# Altium PCB Transmitter.PcbDoc (part 2 of 2)
Units mm, origin at the board's own origin, x right, y up, seen from the top; angles counter-clockwise.
Board outline 55 x 40.38 mm, 4 copper layers (Top Layer, GND, Power, Bottom Layer), stack 1.56 mm thick; 129 components, 71 nets, 438 pads, 189 vias.
Unrouted connection lines stored in the file: 5.
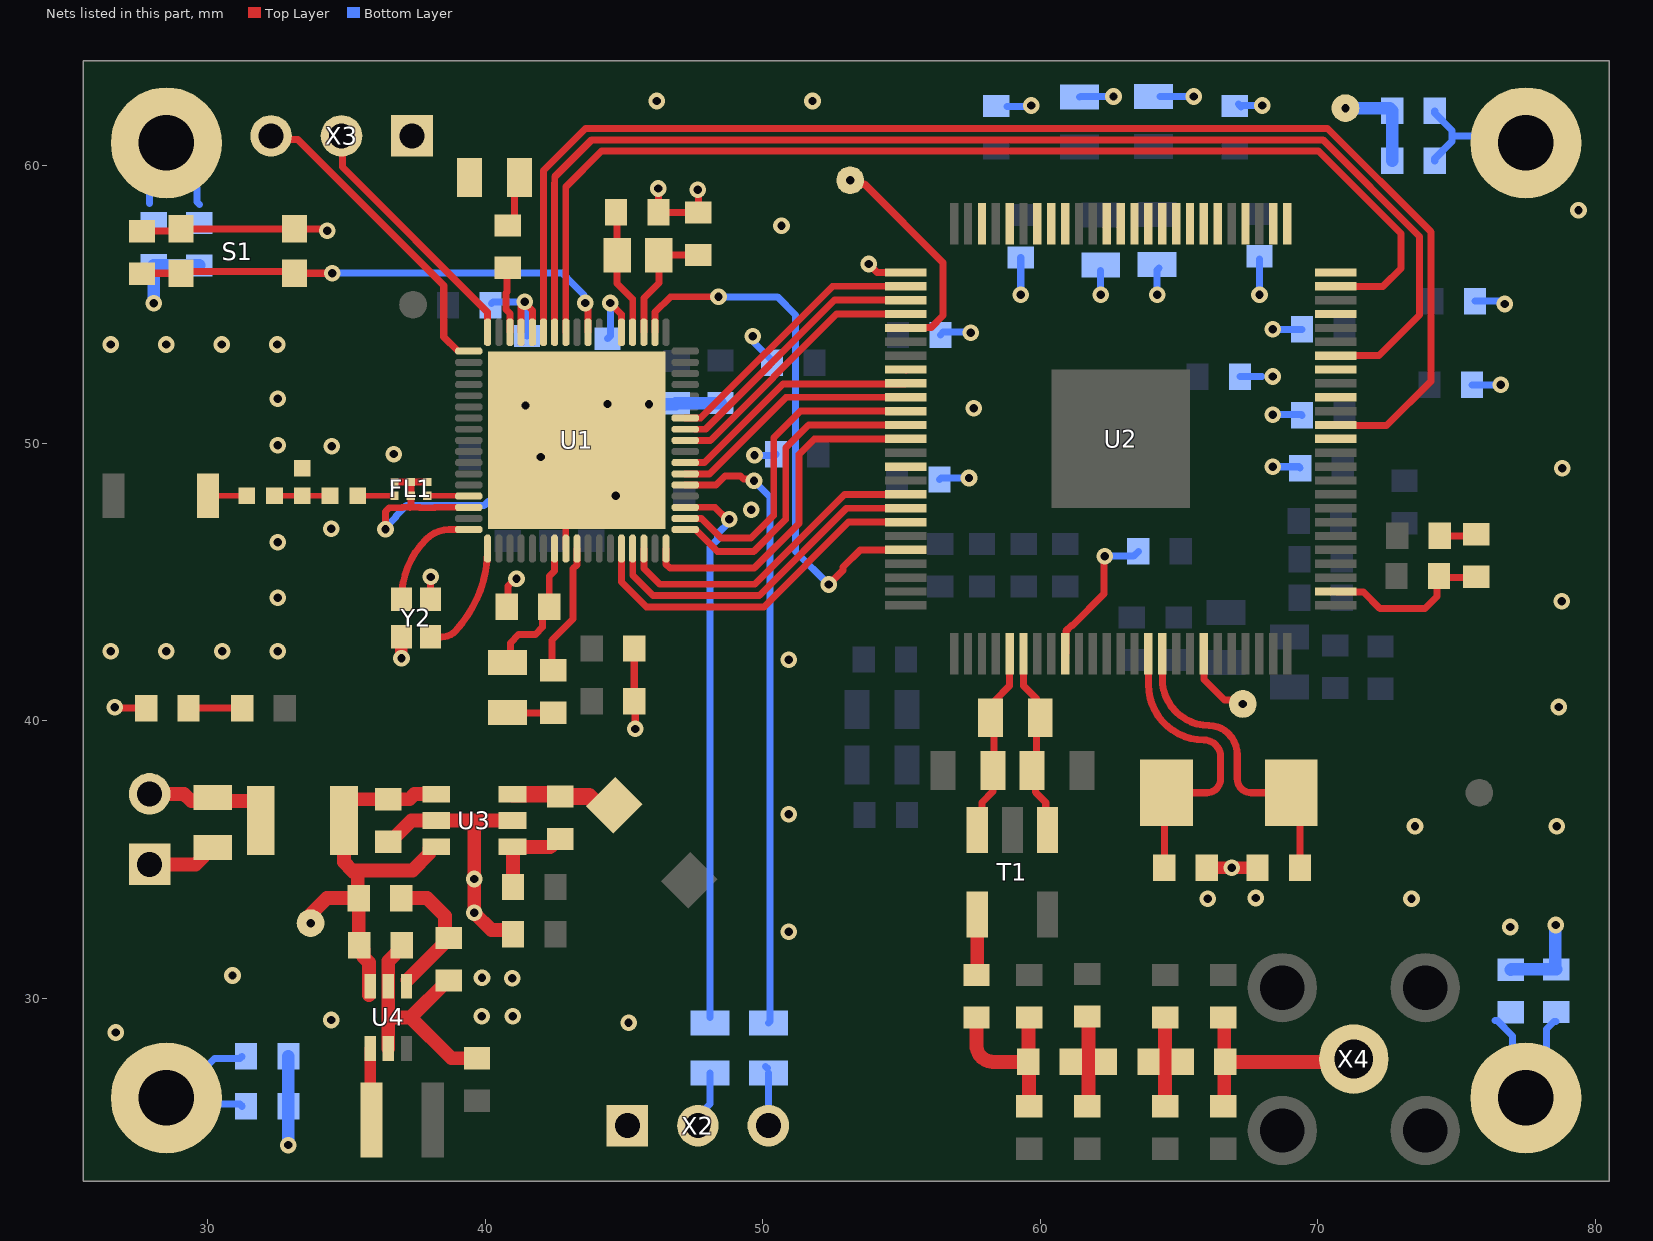
[diagram p4: the nets of this part, all layers, seen from the top]

## Via types
v1: diameter 0.6, hole 0.3, Top Layer to Bottom Layer, tented both sides, 175 vias
v2: diameter 0.6, hole 0.3, Top Layer to Bottom Layer, tented bottom, 6 vias
v3: diameter 0.6, hole 0.5, Top Layer to Bottom Layer, tented both sides, 4 vias
v4: diameter 0.6, hole 0.3, Top Layer to Bottom Layer, 3 vias
v5: diameter 0.6, hole 0.5, Top Layer to Bottom Layer, 1 vias

## Nets (pads, with @x,y where several pads share a name; then routed paths per layer and width w, separated by ;. In a path a pad name is that pad's centre, name@x,y a point inside that pad or via, vN(x,y) a via of type N, cw(c..) or ccw(c..) an arc to the next point about the centre after c; other vN are vias at no path point) (continued)
DGND: C1.1 C2.1 C4.1 C5.1 C6.1 C7.1 C8.1 C9.1 C10.1 C11.1 C12.1 C13.2 C14.1 C15.1 C17.1 C18.1 C19.1 C20.2 C21.2 C22.1 C23.2 C24.1 C25.1 C26.1 C27.1 C28.1 C29.1 C30.1 C31.1 C39.2 C40.1 C41.1 C42.1 C43.1 C44.1 C45.1 C46.1 C53.1 C54.1 C63.1 C64.1 C65.1 C66.1 D1.1 FB5.2 FL1.1 FL1.2 FL1.3 FL1.4 GND.1 L6.2 R4.1 R12.1 R13.1 R14.1 R15.1 R16.2 S1.2 U1.32 U1.42 U1.69 U2.13 U2.16 U2.18 U2.22 U2.25 U2.26 U2.27 U2.29 U2.31 U2.32 U2.33 U2.34 U2.35 U2.36 U2.37 U2.38 U2.39 U2.42 U2.43 U2.44 U2.46 U2.48 U2.51 U2.58 U2.65 U3.2 U3.5 U4.2 U4.5 X1.1 X2.1 X3.1 Y2.2 Y2.4 | length 96.9
  Top Layer w0.248: v1(36.4,46.9) 36.4,47.528 36.545,47.674 36.99,47.674 37.007,47.69 37.287,47.69 37.619,47.69 37.636,47.674 38.164,47.674 38.18,47.689 U1.32@39.4,47.688 ; U1.42@42.898,46.2 42.898,49.698 U1.69@43.3,50.1
  Top Layer w0.254: v1@26.8,40.4 26.846,40.446 D1.1@27.773,40.446 ; C22.1@27.64,57.655 28.955,57.655 S1.2@29.09,57.79 ; S1.2@29.025,57.725 v1@34.175,57.725 ; FL1.3@36.726,48.6 FL1.2@37.313,48.6 ; 37.287,47.69 37.313,47.716 FL1.4@37.313,48.1 FL1.2@37.313,48.6 ; FL1.1@37.9,48.6 FL1.2@37.313,48.6 ; Y2.4@38.025,44.375 v1@38.025,45 ; C14.1@40.77,44.1 40.818,44.148 40.818,44.848 41.08,45.11 v1(41.123,45.11) ; C13.2@45.367,40.7 45.402,40.665 v1(45.402,39.7) ; C13.2@45.367,40.8 C12.1@45.367,42.6 ; v1@46.25,59.1 46.24,59.1 C21.2@46.24,58.325 46.24,58.315 C20.2@47.635,58.315 ; C20.2@47.625,58.305 C20.2@47.635,58.315 ; C20.2@47.655,58.335 C20.2@47.635,58.315 ; v1@47.675,59.025 C20.2@47.675,58.315 C20.2@47.635,58.315 ; v1(53.814,56.455) 53.821,56.455 54.123,56.154 U2.51@55.147,56.154 ; U2.58@55.147,52.654 U2.58@55.17,52.631
  Top Layer w0.45: Y2.2@36.949,43.025 36.975,42.999 v1(36.975,42.25) ; C53.1@66,34.7 v1(66.9,34.7) C54.1@67.835,34.7
  Top Layer w0.5: X1.1@27.9,34.819 29.557,34.819 29.85,35.112 29.85,35.235 30.05,35.435 C2.1@30.3,35.435 ; U4.2@36.5,28.175 36.5,29.3 ; C1.1@36.5,35.635 36.575,35.635 37.34,36.4 U3.2@38.225,36.4 39.6,36.4 ; C5.1@36.984,31.9 36.984,31.825 36.5,31.341 U4.5@36.5,30.425 36.5,29.3 ; C7.1@38.719,30.635 38.644,30.635 37.309,29.3 ; C6.1@39.7,27.83 38.779,27.83 37.309,29.3 ; U3.5@40.975,36.4 39.6,36.4 ; C4.1@41,32.3 41,32.303 40.85,32.453 40.217,32.453 v1(39.599,33.071) v1(39.599,34.29) 39.6,34.291 39.6,36.4 ; 36.5,29.3 37.309,29.3
  Bottom Layer w0.254: v1(36.4,46.9) 36.4,46.967 36.773,47.34 36.773,47.373 37.15,47.75 39.95,47.75 39.952,47.752 39.957,47.752 40.093,47.888 40.688,47.888 C18.1@40.8,48 C19.1@42.4,48 ; v1(41.447,51.357) 41.447,52.282 C15.1@41.5,52.335 ; C10.1@43.815,48.009 C10.1@43.906,48.1 ; v1(44.4,51.414) R4.1@44.4,52.235 ; v1(49.632,53.848) 49.698,53.782 49.698,53.612 50.335,52.975 C45.1@50.335,52.9 ; v1(49.701,49.562) 50.432,49.562 C46.1@50.47,49.6 ; C31.1@56.366,48.692 56.416,48.743 v1(57.429,48.743) ; C30.1@56.4,53.9 56.5,54 v1@57.5,54 ; C44.1@58.795,62.142 59.641,62.142 v1(59.67,62.17) ; C29.1@59.297,56.689 59.297,55.603 v1@59.3,55.6 ; C40.1@61.417,62.47 61.442,62.495 v1(62.642,62.495) ; v1(62.179,55.347) C23.2@62.179,56.228 ; v1@64.211,55.239 64.211,56.244 C24.1@64.274,56.306 ; C39.2@64.309,62.495 v1(65.534,62.495) ; C43.1@67.142,62.217 67.242,62.117 67.295,62.17 v1(68.005,62.17) ; FB5.2@67.2,52.4 68,52.4 ; v1@67.9,55.6 C28.1@67.9,56.635 ; v1(68.377,49.149) 69.321,49.149 C25.1@69.37,49.1 ; v1@68.428,54.102 69.433,54.102 C27.1@69.435,54.1 ; v1@68.453,51.029 69.406,51.029 C26.1@69.435,51 ; C41.1@75.565,52.1 v1(76.6,52.1) ; C42.1@75.67,55.118 76.573,55.118 76.673,55.018 v1(76.74,55.018)
  Bottom Layer w0.45: v1(28.042,55.042) C66.1@28.042,56.41 R15.1@29.69,56.41 ; v1(32.9,24.7) C63.1@32.9,27.9 ; C17.1@40.965,49.5 v1(42,49.5) ; C10.1@43.906,48.1 C11.1@45.635,48.1 ; v1(45.9,51.4) 46.865,51.4 46.865,51.445 C9.1@48.475,51.445 ; v2(71,62.075) 72.592,62.075 C65.1@72.692,61.975 ; R14.1@72.689,60.178 C65.1@72.689,61.978 ; C64.1@76.962,31.016 76.976,31.03 R13.1@78.6,31.03 ; R13.1@78.565,31.065 78.565,32.605 78.568,32.608 78.568,32.615 v1@78.565,32.618
  other v1: 26.677,28.756 45.161,29.108 34.442,29.21 39.869,29.343 40.986,29.343 40.97,30.709 39.878,30.734 50.935,32.385 76.937,32.563 78.578,32.631 66.04,33.579 73.381,33.579 67.767,33.604 73.508,36.195 78.613,36.195 50.935,36.627 26.642,40.477 78.689,40.488 50.935,42.189 26.5,42.5 28.5,42.5 30.521,42.5 32.521,42.5 78.791,44.298 32.521,44.428 38.035,45.179 32.521,46.428 34.442,46.914 49.581,47.6 44.7,48.1 78.816,49.098 36.703,49.606 34.468,49.886 32.521,49.928 68.377,51.029 57.607,51.257 32.521,51.6 68.377,52.4 26.496,53.555 28.496,53.555 30.496,53.555 32.496,53.555 57.493,53.98 68.377,54.102 59.293,55.347 64.211,55.347 67.9,55.347 34.295,57.655 50.673,57.836 79.4,58.395 47.66,59.129 46.235,59.179 46.177,62.332 51.791,62.332
  other v4: 30.886,30.81
DRCTL: U1.52 U2.62 | length 11.7
  Top Layer w0.248: U1.52@47.2,46.884 47.575,46.884 48.358,46.101 49.673,46.101 50.825,47.253 50.825,49.825 51.654,50.654 U2.62@55.147,50.654
DRHOLD: U1.51 U2.63 | length 12.6
  Top Layer w0.248: U1.51@46.516,46.2 46.517,46.199 46.517,45.632 46.649,45.5 49.691,45.5 51.3,47.109 51.3,49.6 51.854,50.154 U2.63@55.147,50.154
DROVER: U1.53 U2.61 | length 11.8
  Top Layer w0.248: U1.53@47.201,47.285 47.787,47.285 48.497,46.575 49.572,46.575 50.394,47.396 50.394,50.194 51.354,51.154 U2.61@55.147,51.154
"I/O RESET": U1.2 U2.71 | length 19.9
  Top Layer w0.248: U1.2@46.114,54 46.114,54.725 46.664,55.275 v1(48.4,55.275)
  Top Layer w0.254: v1(52.377,44.905) 52.891,45.419 52.891,45.533 53.512,46.154 U2.71@55.147,46.154
  Bottom Layer w0.254: v1(48.4,55.275) 50.525,55.275 51.181,54.619 51.181,46.101 v1(52.377,44.905)
"I/O UPDATE": U1.58 U2.59 | length 9.1
  Top Layer w0.248: U1.58@47.2,49.296 47.897,49.297 50.727,52.127 54.4,52.127 54.404,52.131 55.124,52.131 U2.59@55.147,52.154
IOUT_N: R9.1 R10.2 T1.1 U2.80 | length 6.8
  Top Layer w0.254: T1.1@57.727,36.054 57.897,36.224 57.897,37.054 58.297,37.454 58.297,38.154 58.332,38.189 58.332,39.954 58.332,40.689 58.897,41.254 U2.80@58.897,42.404
IOUT_P: R8.2 R10.1 T1.3 U2.81 | length 6.7
  Top Layer w0.254: U2.81@59.397,42.404 59.397,41.254 59.862,40.789 59.862,39.954 59.862,38.184 59.832,38.154 59.832,37.419 60.197,37.054 60.197,36.124 T1.3@60.267,36.054
LED: D2.2 U1.15 | length 2.4
  Top Layer w0.248: D2.2@40.8,56.32 40.779,56.299 40.779,55.444 40.748,55.413 40.748,54.813 40.887,54.674 U1.15@40.887,54.001
LPUART_RX: U1.18 X3.3 | length 11
  Top Layer w0.254: X3.3@32.275,61.075 32.404,60.946 33.237,60.946 38.5,55.683 38.5,53.829 U1.18@38.989,53.34
LPUART_TX: U1.17 X3.2 | length 8.8
  Top Layer w0.254: X3.2@34.75,60.975 34.85,60.875 34.85,59.95 40.081,54.719 U1.17@40.081,54.381
MASTER_RESET: U1.12 U2.14 | length 49.5
  Top Layer w0.248: U1.12@42.095,54.001 42.095,54.812 42.096,54.813 42.096,59.538
  Top Layer w0.254: 42.096,59.538 42.096,59.825 43.612,61.341 70.359,61.341 74.081,57.619 74.081,52.231 72.481,50.631 70.67,50.631 U2.14@70.647,50.654
MISO: U1.48 U2.68 | length 12.4
  Top Layer w0.248: U1.48@45.31,46.2 45.31,45.244 46.048,44.506 49.872,44.506 53.02,47.654 U2.68@55.128,47.654
MOSI: U1.49 U2.67 | length 11.7
  Top Layer w0.248: U1.49@45.712,46.2 45.712,45.488 46.287,44.913 49.704,44.913 52.945,48.154 U2.67@55.147,48.154
NetA1_1: A1.1 L5.2 | length 1.5
  Top Layer w0.2: A1.1@29.9,48.1 L5.2@31.4,48.1
NetC2_2: C2.2 F1.1 X1.2 | length 4.6
  Top Layer w0.5: X1.2@27.9,37.359 29.141,37.359 29.4,37.1 30.3,37.1 31.527,37.1 31.9,36.727 F1.1@31.9,36.4
NetC3_1: C3.1 R1.1 U3.4 | length 3.3
  Top Layer w0.5: C3.1@41,34 41,35.425 U3.4@40.975,35.45 42.34,35.45 42.625,35.735 R1.1@42.7,35.735
NetC7_2: C7.2 R2.1 U4.4 | length 4.9
  Top Layer w0.5: R2.1@36.965,33.6 37.9,33.6 38.545,32.955 38.545,32.309 38.689,32.165 C7.2@38.719,32.165 ; U4.4@37.199,30.645 38.569,32.015 38.575,32.015 C7.2@38.719,32.159
NetC14_2: C14.2 L4.2 U1.41 | length 4.6
  Top Layer w0.248: L4.2@40.8,42.1 40.9,42.2 40.9,42.8 41.2,43.1 41.8,43.1 42.065,43.365 42.065,44.1 C14.2@42.1,44.135 ; C14.2@42.3,44.1 42.3,45.2 42.494,45.394 U1.41@42.494,45.735
NetC15_2: C15.2 FB6.2 U1.13 U1.14 | length 4.9
  Top Layer w0.248: U1.14@41.29,54 41.29,54.93 v1@41.422,55.061 ; v1(41.422,55.093) v1@41.422,55.061 ; v1@41.453,55.093 v1@41.422,55.061 ; U1.13@41.692,54 41.692,54.785 41.422,55.055 v1@41.422,55.061
  Bottom Layer w0.254: FB6.2@40.218,55.042 40.269,55.093 v1(41.422,55.093) 41.453,55.093 41.453,53.912 C15.2@41.5,53.865
NetC16_1: C16.1 L5.1 L6.1 | length 2
  Top Layer w0.2: L5.1@32.4,48.1 L6.1@33.4,48.1 C16.1@34.4,48.1
NetC16_2: C16.2 FL1.6 | length 1.3
  Top Layer w0.2: C16.2@35.4,48.1 FL1.6@36.726,48.1
NetC22_2: C22.2 S1.1 U1.8 | length 17.8
  Top Layer w0.2: C22.2@27.588,56.073 C22.2@27.623,56.107
  Top Layer w0.248: U1.8@43.702,54 v1@43.702,54.854
  Top Layer w0.254: C22.2@27.64,56.125 S1.1@29.025,56.125 29.09,56.19 33.06,56.19 S1.1@33.125,56.125 33.126,56.124 v1(34.475,56.125) ; v1(43.6,55.05) 43.6,54.956 v1@43.702,54.854
  Bottom Layer w0.254: v1(34.475,56.125) 42.775,56.125 43.164,55.736 43.558,55.342 43.558,55.042 v1@43.6,55
NetC55_1: C55.1 C59.2 L7.1 W1.2 | length 6.4
  Top Layer w0.5: W1.2@57.7,29.3 57.7,28.3 ccw(c58.3,28.3) 58.3,27.7 L7.1@59.57,27.7 ; C59.2@59.6,26.1 59.6,27.67 ccw(c59.57,27.67) L7.1@59.57,27.7 ; C55.1@59.6,29.3 ccw(c59.6,29.27) 59.57,29.27 L7.1@59.57,27.7
NetC56_1: C56.1 C60.2 L7.2 L8.1 | length 4.5
  Top Layer w0.5: L7.2@61.1,27.7 61.7,27.7 61.735,27.7 ; C60.2@61.7,26.1 61.735,26.135 61.735,27.7 ; C56.1@61.7,29.335 61.735,29.3 61.735,27.7 ; L8.1@62.37,27.7 61.8,27.7 61.735,27.7
NetC57_1: C57.1 C61.2 L8.2 L9.1 | length 4.4
  Top Layer w0.5: L8.2@63.9,27.7 64.5,27.7 ; C61.2@64.5,26.1 64.5,27.7 ; C57.1@64.5,29.3 64.5,27.7 ; L9.1@65.135,27.7 64.5,27.7
NetC58_1: C58.1 C62.2 L9.2 X4.1 | length 7.6
  Top Layer w0.5: C62.2@66.6,26.1 66.633,26.133 66.633,27.667 L9.2@66.665,27.7 ; C58.1@66.675,29.3 66.633,29.258 66.633,27.733 L9.2@66.665,27.7 ; X4.1@71,27.8 70.9,27.7 L9.2@66.665,27.7
NetC67_1: C67.1 R17.1 | length 1.7
  Top Layer w0.254: R17.1@74.397,46.66 C67.1@75.867,46.66 ; C67.1@75.841,46.66 C67.1@75.997,46.815
NetC67_2: C67.2 C68.2 U2.2 | length 6.2
  Top Layer w0.254: U2.2@70.647,44.654 70.67,44.631 71.65,44.631 72.238,44.044 73.863,44.044 74.299,44.479 74.299,45.108 74.377,45.187 74.403,45.161 74.828,45.161 C67.2@75.692,45.161
NetD1_2: D1.2 R3.1 | length 1.9
  Top Layer w0.254: D1.2@29.303,40.446 R3.1@31.238,40.446
NetD2_1: D2.1 R16.1 | length 1.9
  Top Layer w0.254: D2.1@40.8,57.85 41.05,58.1 41.05,59.4 R16.1@41.225,59.575
NetFL1_5: FL1.5 U1.31 | length 1.5
  Top Layer w0.2: FL1.5@37.9,48.1 U1.31@39.4,48.1
NetL1_1: L1.1 R1.2 U3.6 | length 3.8
  Top Layer w0.6: U3.6@40.975,37.35 42.615,37.35 R1.2@42.7,37.265 43.735,37.265 44.05,36.95 L1.1@44.65,36.95
NetL2_2: L2.2 U4.1 | length 2.6
  Top Layer w0.4: L2.2@35.85,25.65 U4.1@35.85,28.175
  Top Layer w0.5: L2.2@35.85,25.65 L2.2@35.9,25.6
NetL3_1: L3.1 U1.43 | length 4.6
  Top Layer w0.248: L3.1@42.397,42.164 42.397,42.897 43.158,43.658 43.158,45.473 43.299,45.615 U1.43@43.3,46.2
  Top Layer w0.254: L3.1@42.443,41.546 L3.1@42.559,41.662
NetL3_2: L3.2 L4.1 | length 1.7
  Top Layer w0.254: L4.1@40.8,40.3 40.819,40.281 L3.2@42.443,40.281
NetR4_2: R4.2 U1.5 | length 2.5
  Top Layer w0.248: v1(44.503,55.05) 44.907,54.645 U1.5@44.908,54
  Bottom Layer w0.254: R4.2@44.4,53.765 44.503,53.868 v1(44.503,55.05)
NetR5_2: R5.2 X2.3 | length 2
  Bottom Layer w0.254: R5.2@50.1,27.535 R5.2@50.16,27.475 ; X2.3@50.2,25.4 R5.2@50.2,27.3
NetR6_2: R6.2 X2.2 | length 2.1
  Bottom Layer w0.254: X2.2@47.66,25.4 47.66,25.737 48.1,26.177 R6.2@48.1,27.3
NetR7_2: R7.2 U2.84 | length 5.4
  Top Layer w0.254: U2.84@60.897,42.404 60.92,42.427 60.92,43.222 61.131,43.433 61.162,43.433 62.3,44.571 v1@62.3,45.9
  Bottom Layer w0.254: v1(62.32,45.926) 63.361,45.926 R7.2@63.535,46.1
NetREF_1: REF.1 U2.94 | length 2.7
  Top Layer w0.254: U2.94@65.897,42.404 65.906,42.395 65.906,41.482 66.646,40.743 67.157,40.743 v2(67.3,40.6)
NetSYNC_1: SYNC.1 U2.55 | length 8
  Top Layer w0.254: v2(53.15,59.475) 53.293,59.332 53.672,59.332 56.5,56.505 56.5,54.6 56.077,54.177 55.17,54.177 U2.55@55.147,54.154
NetT1_6: T1.6 W1.1 | length 2.1
  Top Layer w0.5: W1.1@57.727,30.857 T1.6@57.727,33.006
OSC_HSE_N: U1.34 Y2.1 | length 4
  Top Layer w0.248: Y2.1@36.975,44.375 Y2.1@36.99,44.676 ; Y2.1@36.99,44.677 36.991,44.683 cw(c40.048,44.375) 37.867,46.54 cw(c38.698,45.709) 38.698,46.884 U1.34@39.4,46.884
OSC_HSE_P: U1.35 Y2.3 | length 4.2
  Top Layer w0.248: Y2.3@38.025,43.025 38.276,43.025 38.302,43.025 ccw(c38.417,43.724) 38.919,43.224 ccw(c38.743,43.399) 38.924,43.23 ccw(c35.687,46.205) 40.083,46.115 U1.35@40.084,46.2
OSC_LSE_N: C21.1 U1.4 Y1.1 | length 4.5
  Top Layer w0.248: 44.75,55.76 45.31,55.2 U1.4@45.31,54
  Top Layer w0.254: C21.1@44.71,58.275 cw(c44.613,58.178) 44.75,58.178 Y1.1@44.75,56.775 44.75,55.76
OSC_LSE_P: C20.1 U1.3 Y1.2 | length 4.3
  Top Layer w0.248: U1.3@45.712,54 45.712,55.237 46.25,55.775
  Top Layer w0.254: 46.25,55.775 Y1.2@46.25,56.775 47.551,56.775 ccw(c47.551,56.809) C20.1@47.575,56.785
OSK: U1.57 U2.60 | length 9.6
  Top Layer w0.248: U1.57@47.2,48.894 48.075,48.894 50.835,51.654 U2.60@55.147,51.654 U2.60@55.679,51.654
P0: U1.60 U2.54 | length 9.8
  Top Layer w0.248: U1.60@47.2,50.1 48.107,50.1 52.661,54.654 U2.54@55.147,54.654
P1: U1.61 U2.53 | length 9.5
  Top Layer w0.248: U1.61@47.557,50.502 47.934,50.502 52.586,55.154 U2.53@55.147,55.154
P2: U1.62 U2.52 | length 9.9
  Top Layer w0.248: U1.62@47.2,50.904 47.762,50.905 52.512,55.654 U2.52@55.147,55.654
PLL_LOCK: U1.11 U2.19 | length 45.2
  Top Layer w0.248: U1.11@42.496,54 42.496,59.368 42.499,59.371 42.499,59.599 42.502,59.602
  Top Layer w0.254: 42.502,59.602 43.835,60.935 70.191,60.935 73.675,57.45 73.675,54.625 72.204,53.154 U2.19@70.647,53.154
RAM_SWP_OVR: U1.10 U2.24 | length 41
  Top Layer w0.248: U1.10@42.898,54 42.898,59.24 42.899,59.242
  Top Layer w0.254: 42.899,59.242 42.899,59.243 44.185,60.528 70.022,60.528 73,57.551 73,56.3 72.354,55.654 U2.24@70.647,55.654
REF_CLK_N: C54.2 U2.91 Y3.2 | length 11.1
  Top Layer w0.254: U2.91@64.397,42.404 64.408,42.393 64.408,41.316 ccw(c66.089,41.513) 66.089,39.821 cw(c66.089,38.849) 66.776,39.537 cw(c65.995,38.755) 67.1,38.755 67.1,37.9 ccw(c67.6,37.9) 67.6,37.4 Y3.2@69.05,37.4 69.365,37.085 C54.2@69.365,34.7
REF_CLK_P: C53.2 U2.90 Y3.1 | length 10.6
  Top Layer w0.254: U2.90@63.9,42.044 63.9,41.3 ccw(c65.9,41.3) 65.9,39.3 cw(c65.9,38.7) 66.5,38.7 66.5,37.9 cw(c66,37.9) 66,37.4 Y3.1@64.55,37.4 64.47,37.32 C53.2@64.47,34.7
SCLK: U1.47 U2.69 | length 13.1
  Top Layer w0.248: U1.47@44.908,46.2 44.908,44.992 45.8,44.1 50.041,44.1 53.095,47.154 U2.69@55.147,47.154
SHLD_MH1: C63.2 H1.1 R12.2 | length 6.6
  Bottom Layer w0.254: R12.2@31.235,26.1 31.16,26.175 30.322,26.175 30.314,26.183 29.017,26.183 28.3,26.9 29.314,26.9 30.239,27.825 31.16,27.825 C63.2@31.235,27.9
SHLD_MH2: C64.2 H2.1 R13.2 | length 6.8
  Bottom Layer w0.254: 76.397,29.189 76.472,29.189 77.026,28.635 77.026,26.925 77.697,26.254 78.249,26.806 78.249,28.881 78.522,29.154 R13.2@78.597,29.154
SHLD_MH3: C65.2 H3.1 R14.2 | length 5.1
  Bottom Layer w0.254: R14.2@74.219,60.178 74.219,60.253 74.847,60.881 74.847,61.075 ; C65.2@74.219,61.978 74.219,61.903 74.847,61.275 74.847,61.075 ; H3.1@77.4,61.9 H3.1@77.5,62 ; H3.1@77.5,61.075 74.847,61.075
SHLD_MH4: C66.2 H4.1 R15.2 | length 7.7
  Bottom Layer w0.254: 27.9,58.634 27.9,61.7 28.3,62.1 29.017,61.383 29.017,59.783 29.603,59.197 29.603,58.701 29.7,58.603
SWCLK: R5.1 U1.56 | length 22.5
  Top Layer w0.248: U1.56@47.2,48.492 47.752,48.491 48.311,48.491 48.64,48.82 49.199,48.82 49.311,48.708 49.615,48.708 v1(49.682,48.641)
  Bottom Layer w0.254: v1(49.682,48.641) 50.258,48.066 50.258,29.158 R5.1@50.2,29.1
SWDIO: R6.1 U1.54 | length 20
  Top Layer w0.248: U1.54@47.2,47.688 48.276,47.688 48.707,47.257 v1(48.795,47.257)
  Bottom Layer w0.254: R6.1@48.1,29.3 48.1,46.262 48.374,46.536 48.374,46.742 48.795,47.164 v1(48.795,47.257)
VBAT: C1.2 C5.2 F1.2 R2.2 U3.1 U3.3 U4.6 VBAT.1 | length 16.6
  Top Layer w0.5: v2(33.7,32.7) 33.7,33.015 34.285,33.6 R2.2@35.435,33.6 ; U4.6@35.8,30.1 35.8,31.282 35.604,31.478 35.604,31.75 C5.2@35.454,31.9 35.435,31.919 R2.2@35.435,33.6 ; U3.3@38.225,35.45 38.025,35.45 37.975,35.4 37.975,35.2 37.375,34.6 35.4,34.6 35.2,34.6 ; U3.1@38.425,37.35 U3.1@38.225,37.35 37.45,37.35 37.265,37.165 C1.2@36.5,37.165 35.273,37.165 34.9,36.792 F1.2@34.9,36.4 34.9,34.9 35.2,34.6 ; 35.2,34.6 35.4,34.4 35.4,33.635 R2.2@35.435,33.6
pads on no net: A1.2 U1.6 U1.7 U1.9 U1.16 U1.19 U1.20 U1.21 U1.22 U1.23 U1.24 U1.25 U1.26 U1.27 U1.28 U1.29 U1.36 U1.37 U1.38 U1.39 U1.40 U1.50 U1.59 U1.63 U1.64 U1.65 U1.66 U1.67 U2.1 U2.7 U2.8 U2.9 U2.10 U2.12 U2.20 U2.40 U2.41 U2.49 U2.50 U2.72 U2.86 U2.87 U2.93 U2.97 U2.98 U2.99 U2.100

## Polygon pours and split planes (outlines as drawn)
AGND on Bottom Layer "AGND_L04_P002" (solid, remove dead copper, pour order 2): 67.827,40.361 67.791,40.397 65.784,40.397 65.784,40.399 64.819,41.365 64.819,43.386 63.599,43.386 63.321,42.964 63.299,41.211 62.474,40.361 62.474,33.761 63.499,32.736 73.924,32.736 75.299,31.361 75.299,23.911 51.649,23.911 51.649,43.711 53.724,45.786 56.049,45.786 56.149,45.886 56.124,47.761 56.174,47.811 57.924,47.811 59.649,49.536 59.649,52.849 60.111,53.311 65.949,53.311 66.349,52.911 66.349,49.511 67.949,47.886 75.149,47.886 76.024,46.986 75.999,41.286 75.074,40.361
DGND on Bottom Layer "DGND_L04_P005" (solid, remove dead copper, pour order 5): 65.686,40.132 65.679,40.125 64.586,41.217 64.586,42.95 64.591,42.954 64.586,42.958 64.586,43.147 64.455,43.147 64.434,43.168 63.719,43.168 63.469,42.893 63.519,41.093 62.694,40.268 62.694,33.868 63.569,32.993 73.994,32.993 75.519,31.468 75.519,23.918 79.994,23.893 79.994,63.293 25.994,63.293 26.019,23.893 51.369,23.918 51.369,43.793 53.619,46.043 55.844,46.068 55.869,47.893 56.094,48.068 57.794,48.068 59.369,49.643 59.369,52.969 59.968,53.568 66.019,53.568 66.569,53.018 66.569,49.593 68.019,48.143 75.219,48.143 76.219,47.168 76.234,47.058 76.256,41.237 75.16,40.132
AGND on Top Layer "AGND_L01_P000" (solid, remove dead copper, pour order 0): 65.761,40.386 64.801,41.346 64.791,43.159 64.575,43.375 63.575,43.375 63.297,42.954 63.275,41.2 62.45,40.35 62.45,33.75 63.475,32.725 73.9,32.725 75.275,31.35 75.275,23.9 51.625,23.9 51.625,43.7 53.7,45.775 56.025,45.775 56.125,45.875 56.1,47.75 56.15,47.8 57.9,47.8 59.625,49.525 59.625,52.825 60.1,53.3 65.925,53.3 66.325,52.9 66.325,49.5 67.925,47.875 75.125,47.875 76,46.975 75.975,41.275 75.086,40.386
DGND on Top Layer "DGND_L01_P003" (solid, remove dead copper, pour order 3): 64.586,43.147 64.586,41.217 65.679,40.125 75.153,40.125 75.153,40.127 75.419,40.393 76.256,41.237 76.234,47.058 76.219,47.168 75.219,48.143 68.019,48.143 66.569,49.593 66.569,53.018 66.019,53.568 59.968,53.568 59.369,52.969 59.369,49.643 57.794,48.068 56.094,48.068 55.869,47.893 55.844,46.068 53.619,46.043 51.369,43.793 51.369,23.918 26.019,23.893 25.994,63.293 79.994,63.293 79.994,23.893 75.519,23.918 75.519,31.468 73.994,32.993 63.569,32.993 62.694,33.868 62.694,40.268 63.519,41.093 63.469,42.893 63.7,43.147
1V8 on Top Layer "1V8_L01_P006" (solid, pour order 6): 42.381,25.35 42.196,24.934 41.894,24.829 38.261,24.829 37.215,26.094 37.015,26.925 37.015,26.993 38.515,26.993 38.794,26.714 42.02,26.714 42.348,26.386
3V3 on Power (split plane): 72.362,48.745 71.701,48.085 63.215,48.085 63.213,48.084 63.211,48.085 63.188,48.079 63.165,48.075 63.164,48.074 63.162,48.073 63.143,48.06 63.123,48.047 63.122,48.045 63.12,48.044 62.527,47.41 61.633,46.517 61.605,46.475 61.596,46.425 61.596,44.179 60.946,43.529 59,43.529 58.95,43.52 58.908,43.492 58.408,42.992 58.38,42.95 58.371,42.9 58.371,41.654 58.046,41.329 56.7,41.329 56.65,41.32 56.608,41.292 55.808,40.492 55.78,40.45 55.771,40.4 55.771,40.3 55.771,31.654 53.846,29.729 43.054,29.729 39.779,33.004 39.779,38.15 39.77,38.2 39.742,38.242 38.572,39.411 38.53,39.439 38.481,39.449 26.01,39.449 26.01,43.2 32,43.2 32,53 26.01,53 26.01,63.265 72.362,63.265
1V8 on Power (split plane): 79.99,23.91 26.01,23.91 26.01,29.771 36.6,29.771 36.65,29.78 36.692,29.808 39.65,32.767 42.908,29.508 42.95,29.48 43,29.471 53.9,29.471 53.95,29.48 53.992,29.508 55.992,31.508 56.02,31.55 56.029,31.6 56.029,40.3 56.029,40.346 56.754,41.071 58.1,41.071 58.15,41.08 58.192,41.108 58.592,41.508 58.62,41.55 58.629,41.6 58.629,42.846 59.054,43.271 61,43.271 61.05,43.28 61.092,43.308 61.817,44.033 61.845,44.075 61.854,44.125 61.854,46.371 62.712,47.229 62.713,47.23 62.715,47.232 63.271,47.826 71.78,47.826 71.83,47.836 71.872,47.864 71.9,47.906 71.903,47.92 72.583,48.6 72.611,48.642 72.621,48.692 72.621,63.265 79.99,63.265
VBAT on Power (split plane): 39.521,38.096 39.521,33 39.508,32.992 36.546,30.029 26.01,30.029 26.01,39.19 32.636,39.19 32.65,39.18 32.7,39.171 33.1,39.171 33.15,39.18 33.164,39.19 38.427,39.19
DGND on GND (split plane): 79.99,23.91 75.529,23.91 75.529,31.4 75.52,31.45 75.492,31.492 74.042,32.942 74,32.97 73.95,32.979 63.579,32.979 62.704,33.854 62.704,37.176 62.704,40.246 63.017,40.558 63.489,41.03 63.517,41.072 63.526,41.122 63.526,42.943 63.704,43.121 64.59,43.121 64.59,41.25 64.6,41.2 64.628,41.158 65.644,40.142 65.686,40.114 65.735,40.104 75.109,40.104 75.158,40.114 75.2,40.142 75.467,40.408 76.217,41.158 76.245,41.2 76.254,41.25 76.254,47.05 76.245,47.1 76.217,47.142 75.267,48.092 75.225,48.12 75.175,48.129 68.029,48.129 66.579,49.579 66.579,52.95 66.57,53 66.542,53.042 66.067,53.517 66.025,53.545 65.975,53.554 60.026,53.554 59.976,53.545 59.934,53.517 59.408,52.991 59.38,52.949 59.371,52.899 59.371,49.629 57.801,48.059 56.109,48.059 56.059,48.049 56.017,48.021 55.89,47.894 55.862,47.852 55.852,47.803 55.852,46.027 53.645,46.027 53.595,46.017 53.553,45.989 51.408,43.845 51.38,43.803 51.371,43.753 51.371,23.91 26.01,23.91 26.01,43.2 32,43.2 32,53 26.01,53 26.01,63.265 79.99,63.265
AGND on GND (split plane): 66.321,52.896 66.321,49.525 66.33,49.475 66.358,49.433 67.883,47.908 67.925,47.88 67.975,47.871 75.121,47.871 75.996,46.996 75.996,41.304 75.283,40.592 75.055,40.363 65.789,40.363 64.849,41.303 64.849,43.18 64.849,43.25 64.839,43.3 64.811,43.342 64.769,43.37 64.719,43.379 63.65,43.379 63.6,43.37 63.558,43.342 63.305,43.089 63.277,43.047 63.268,42.997 63.268,41.176 62.833,40.742 62.483,40.392 62.455,40.35 62.446,40.3 62.446,37.176 62.446,33.8 62.455,33.75 62.483,33.708 63.433,32.758 63.475,32.73 63.525,32.721 73.896,32.721 75.271,31.346 75.271,23.91 51.673,23.91 51.629,23.954 51.629,43.699 53.698,45.768 55.982,45.768 56.031,45.778 56.073,45.806 56.101,45.848 56.111,45.898 56.111,47.749 56.162,47.8 57.855,47.8 57.904,47.81 57.946,47.838 59.592,49.483 59.62,49.525 59.629,49.575 59.629,52.845 60.08,53.296 65.921,53.296

## Other copper
Top Layer:
  region net 1V8: 38.862,25.07 39.395,25.07 39.577,25.43 39.026,25.42 39.243,25.883 39.243,26.695 38.813,26.695 38.482,27.026 37.06,27.026 37,26.966 38.481,24.257
  region net 3V3: 45.212,31.826 47.447,33.35 46.6,34 42.53,34 42.52,31.826
  pour cut-out: 36.4,43.94 36.4,43.459 38.318,43.459 38.55,43.26 38.55,43.94
  region net 3V3: 43,32.5 43,33.45 43.05,33.5 42.6,33.6 42.6,32.633
  region net 3V3: 47.3,33.3 43.4,33.5 42.7,33.5 42.7,33.8 46.6,33.8 46.8,34
  region net NetC2_2: 30.9,36.8 31.4,36.3 31.5,36.167 31.5,36.8
  region net NetC2_2: 28.4,37.7 32.4,37.7 32.4,36.8 29.3,36.8 29,37.1 28.5,37.1
  region net VBAT: 37.5,34.4 37.9,34.7 38.8,35.2 38.8,35.8 37.7,35.8 37.5,35.3 37.2,34.8
  region net VBAT: 35,31.4 35.1,31.3 35.5,31.3 35.6,31.2 35.621,31.2 35.9,31.479 35.9,34.2 35,34.2
  region net VBAT: 35.8,34 36.2,34.4 35.6,34.4 35.6,34
  region net VBAT: 34.4,37.7 38.685,37.7 38.785,37.6 38.8,37.6 38.8,37.1 38.7,37 37.4,36.9 36.9,36.7 36.2,36.7 35.4,35.9 35.4,34.1 35.1,34 34.4,34.9
  region net NetL2_2: 35.5,26.9 35.5,27 35.7,27.8 36,27.8 36.3,27 36.3,26.8
  region net NetL1_1: 41.9,37.1 42.2,36.8 43.7,36.8 43.7,37.1
  region net NetL1_1: 42.9,37.6 43.226,37.274 44.6,35.9 45.7,37 44.7,38
  pour cut-out: 25.5,43.2 32,43.2 32,53 25.5,53
Bottom Layer:
  region net SHLD_MH3: 76.1,59.675 73.8,59.675 73.7,59.775 73.7,62.475 73.8,62.575 76.6,62.575
  region net SHLD_MH2: 79.1,29.9 79,30 75.9,30 75.8,29.9 75.8,27.4 79.1,27.4
  region net SHLD_MH1: 30.2,25.5 31.8,25.5 31.9,25.6 31.9,28.4 31.8,28.5 29.6,28.5 29.1,28
  region net SHLD_MH4: 27.5,60 27.5,57.76 27.704,57.556 29.82,57.556 30.2,57.937 30.2,60.7
  pour cut-out: 25.5,43.2 32,43.2 32,53 25.5,53
GND (plane layer: these items are gaps in the copper):
  pour cut-out: 25.5,43.2 32,43.2 32,53 25.5,53
  lines w0.254: 52,23.4 51.5,23.9 51.5,43.753 53.645,45.898 55.823,45.898 55.982,45.898 55.982,47.803 56.109,47.93 57.855,47.93 59.5,49.575 59.5,52.899 60.026,53.425 65.975,53.425 66.45,52.95 66.45,49.525 67.975,48 74.047,48 75.175,48 76.125,47.05 76.125,41.25 75.375,40.5 75.109,40.234 65.735,40.234 64.719,41.25 64.719,43.18 64.719,43.25 64.375,43.25 63.65,43.25 63.397,42.997 63.397,41.122 62.925,40.65 62.575,40.3 62.575,37.176 62.575,33.8 63.525,32.85 65.75,32.85 73.95,32.85 75.4,31.4 75.4,23.4
Power (plane layer: these items are gaps in the copper):
  pour cut-out: 25.5,43.2 32,43.2 32,53 25.5,53
  lines w0.254: 25.496,39.319 38.481,39.319 39.65,38.15 39.65,32.95 43,29.6 53.9,29.6 55.9,31.6 55.9,40.3 55.9,40.4 56.7,41.2 58.1,41.2 58.5,41.6 58.5,42.9 59,43.4 61,43.4 61.725,44.125 61.725,46.425 62.62,47.32 63.215,47.955 71.78,47.955 71.78,47.981 72.492,48.692 72.492,63.398 ; 25.574,29.9 33.9,29.9 36.6,29.9 39.6,32.9 39.7,32.9 ; 32.7,39.3 33.1,39.3

## Silkscreen, mask and mechanical layers (free items; w line width, h text height)
Top Overlay:
  drawing of 13 lines, arcs and shapes, not listed
  text "MS2022" at 74.125,54.795 h0.8
  text "IBC-TX" at 74.15,53.119 h0.8
  text "PLL LOOP FILTER" at 78.49,38.335 h0.8 r90
Bottom Overlay:
  lines w0.254: 25.5,33 25.5,23.4 35.1,23.4 ; 25.5,54.175 25.5,63.775 35.1,63.775 ; 70.9,23.5 70.981,23.419 80.5,23.419 80.5,33.1 ; 70.9,63.775 80.5,63.775 80.5,54.175
Mechanical 1:
  lines w0.254: 25.5,23.4 80.5,23.4 80.5,28.3 80.5,63.775 25.5,63.775 25.5,23.4
Mechanical 3:
  lines w0.254: 25.5,23.4 25.5,63.775
Drill Drawing:
  circle w0.12: c25.437,7.853 r0.333
  lines w0.12: 25.103,6.02 25.103,6.187 25.27,6.353 25.103,6.52 25.103,6.687 25.27,6.687 25.437,6.52 25.603,6.687 25.77,6.687 25.77,6.52 25.603,6.353 25.77,6.187 25.77,6.02 25.603,6.02 25.437,6.187 25.27,6.02 25.103,6.02 ; 25.103,9.02 25.77,9.02 25.77,9.687 25.103,9.687 25.103,9.02 ; 25.103,11.187 25.77,11.187 25.437,10.52 25.103,11.187 ; 25.103,12.02 25.437,12.187 25.77,12.02 25.603,12.353 25.77,12.687 25.437,12.52 25.103,12.687 25.27,12.353 25.103,12.02 ; 25.103,13.687 25.27,13.687 25.27,13.52 25.603,13.52 25.603,13.687 25.77,13.687 25.77,14.02 25.603,14.02 25.603,14.187 25.27,14.187 25.27,14.02 25.103,14.02 25.103,13.687
  lines w0.3: 24.499,5.57 81.12,5.57 ; 24.499,14.57 81.12,14.57 ; 30.072,4.07 30.072,16.07 ; 36.11,4.07 36.11,16.07 ; 47.147,4.07 47.147,16.07 ; 52.27,4.07 52.27,16.07 ; 59.672,4.07 59.672,16.07 ; 74.707,4.07 74.707,16.07 ; 24.499,4.07 81.12,4.07 81.12,16.07 24.499,16.07 24.499,4.07
  text "Symbol" at 25.399,15.02 h0.72
  text "Count" at 30.522,15.02 h0.72
  text "Hole Size" at 36.56,15.02 h0.72
  text "Plated" at 47.597,15.02 h0.72
  text "Hole Type" at 52.72,15.02 h0.72
  text "Drill Layer Pair" at 60.122,15.02 h0.72
  text "Via/Pad" at 75.157,15.02 h0.72
  text "184" at 30.522,13.52 h0.6
  text "0.300mm (11.81mil)" at 36.56,13.52 h0.6
  text "PTH" at 47.597,13.52 h0.6
  text "Round" at 52.72,13.52 h0.6
  text "Top Layer - Bottom Layer" at 60.122,13.52 h0.6
  text "Via" at 75.157,13.52 h0.6
  text "5" at 30.522,12.02 h0.6
  text "0.500mm (19.69mil)" at 36.56,12.02 h0.6
  text "PTH" at 47.597,12.02 h0.6
  text "Round" at 52.72,12.02 h0.6
  text "Top Layer - Bottom Layer" at 60.122,12.02 h0.6
  text "Via" at 75.157,12.02 h0.6
  text "8" at 30.522,10.52 h0.6
  text "0.900mm (35.43mil)" at 36.56,10.52 h0.6
  text "PTH" at 47.597,10.52 h0.6
  text "Round" at 52.72,10.52 h0.6
  text "Top Layer - Bottom Layer" at 60.122,10.52 h0.6
  text "Pad" at 75.157,10.52 h0.6
  text "1" at 30.522,9.02 h0.6
  text "1.400mm (55.12mil)" at 36.56,9.02 h0.6
  text "PTH" at 47.597,9.02 h0.6
  text "Round" at 52.72,9.02 h0.6
  text "Top Layer - Bottom Layer" at 60.122,9.02 h0.6
  text "Pad" at 75.157,9.02 h0.6
  text "4" at 30.522,7.52 h0.6
  text "1.600mm (62.99mil)" at 36.56,7.52 h0.6
  text "PTH" at 47.597,7.52 h0.6
  text "Round" at 52.72,7.52 h0.6
  text "Top Layer - Bottom Layer" at 60.122,7.52 h0.6
  text "Pad" at 75.157,7.52 h0.6
  text "4" at 30.522,6.02 h0.6
  text "2.000mm (78.74mil)" at 36.56,6.02 h0.6
  text "PTH" at 47.597,6.02 h0.6
  text "Round" at 52.72,6.02 h0.6
  text "Top Layer - Bottom Layer" at 60.122,6.02 h0.6
  text "Pad" at 75.157,6.02 h0.6
  text "206 Total" at 30.522,4.52 h0.6

## Dimensions
25.5,43.2 to 51.369,43.793 on Top Layer
80.5,23.419 to 80.5,63.775 on Outline
25.5,23.4 to 80.5,23.419 on Outline